# Altium PCB TDR2.PcbDoc
Units mm, origin at the board's own origin, x right, y up, seen from the top; angles counter-clockwise.
Board outline 36 x 36 mm, 2 copper layers (Top Layer, Bottom Layer), stack 1.67 mm thick; 27 components, 24 nets, 129 pads, 20 vias.
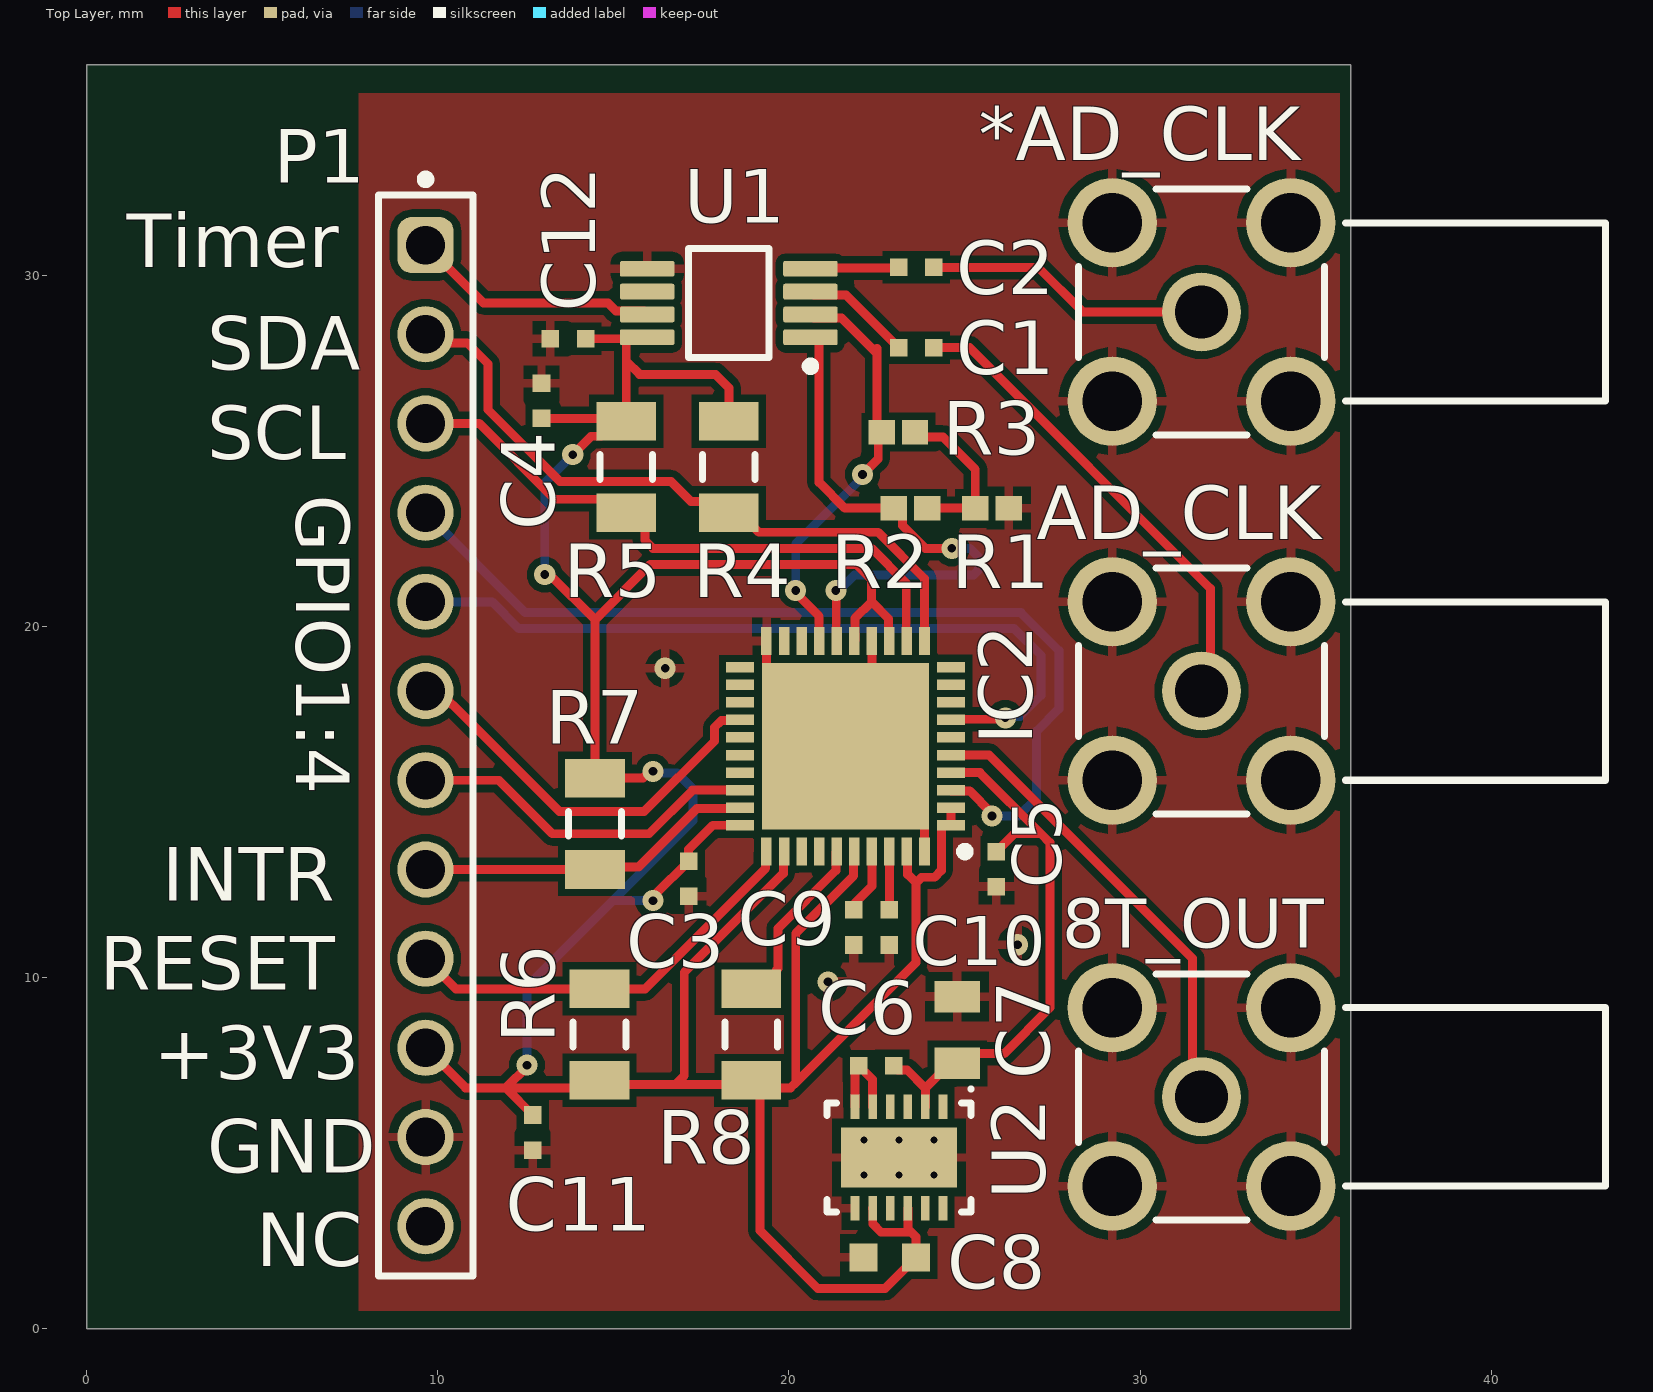
[diagram p0: Top Layer view]
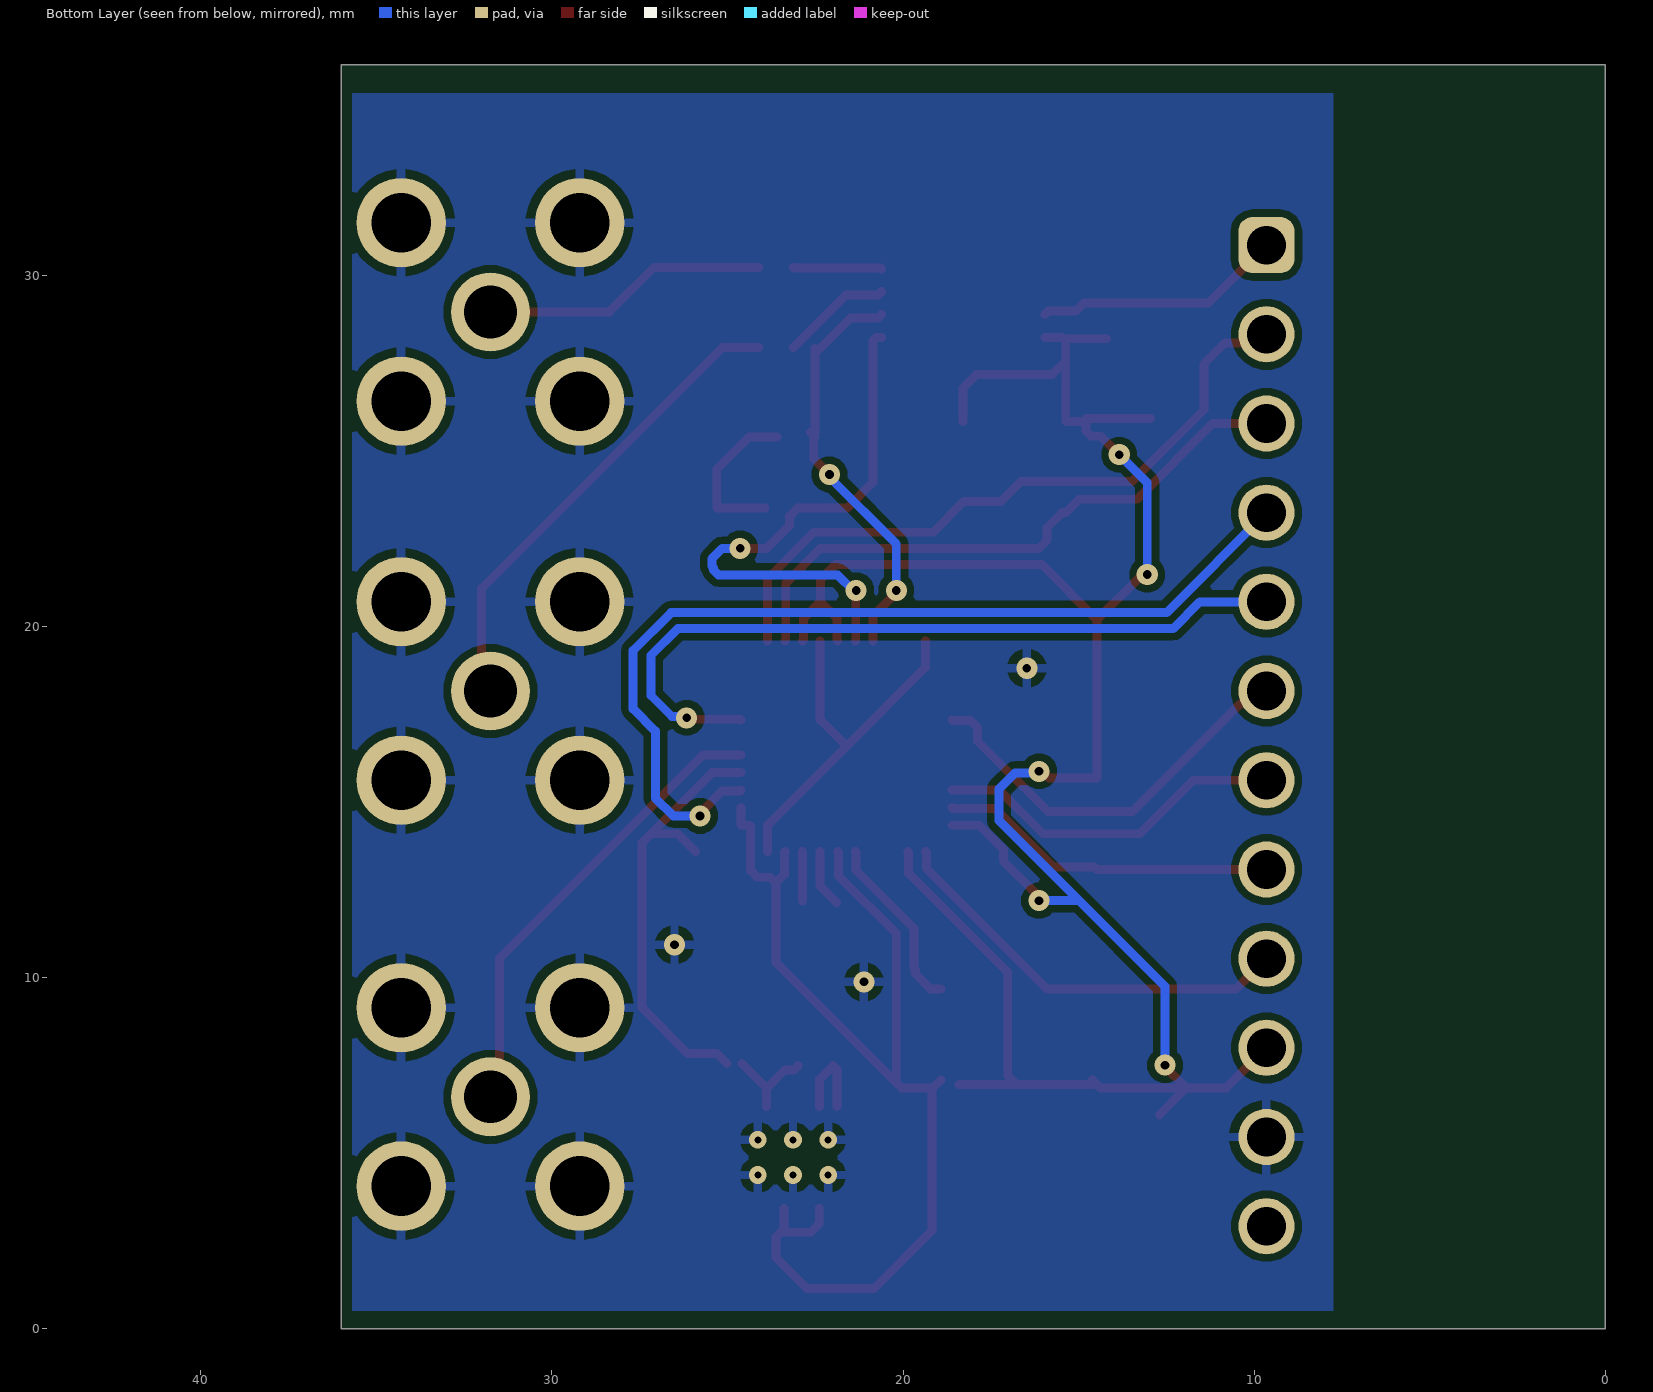
[diagram p1: Bottom Layer view, seen from below]

## Layer stack, top to bottom
Top Solder: solder mask 0.025, Solder Resist, Dk 3.5
Top Layer: signal copper 0.035
Dielectric 1: dielectric 1.6, FR-4, Dk 4.8
Bottom Layer: signal copper 0.035
Bottom Solder: solder mask 0.025, Solder Resist, Dk 3.5

## Board outline
0,0 0,36 36,36 36,0

## Design rules (kind name [scope] priority, off if disabled: settings)
Clearance [All] p1: gap=0.203 ignorepadtopadclearanceinfootprint=FALSE except(0.152: SMDPad-SMDPad)
PolygonConnect [All] p1: connectstyle=Relief reliefconductorwidth=0.254 reliefentries=4 polygonreliefangle="90 Angle" airgapwidth=0.254
RoutingVias [All] p1: holewidth=0.25 width=0.6 viastyle="Through Hole" minholewidth=0.25 minwidth=0.6 maxholewidth=0.25 maxwidth=0.6
SolderMaskExpansion [All] p1: expansion=0.102 istentingtop=FALSE
SupplyNets "Schematic Supply Nets_2" [InNet('GND')] p1: voltage=0.000
SupplyNets "Schematic Supply Nets_1" [InNet('+1V8')] p2: voltage=0.000
SupplyNets "Schematic Supply Nets" [InNet('+3V3')] p3: voltage=0.000
Width [All] p1: maxlimit=0.254 minlimit=0.254 preferedwidth=0.254
30 further rules are at their usual default settings.

## Components (designator, comment, footprint, x,y, rotation, side; value= is the part's Value field where it differs from the comment)
8T_OUT "60311002111526" 60311002111526 -1238.25,1276.604 r90 top
*AD_CLK "60311002111526" 60311002111526 -1238.25,1298.956 r90 top
AD_CLK "60311002111526" 60311002111526 -1238.25,1288.161 r90 top
C1 "0.1uF" WCAP-CSGP_0402_L1W0.5H0.5 23.622,27.94 r0 top
C2 "0.1uF" WCAP-CSGP_0402_L1W0.5H0.5 23.622,30.226 r0 top
C3 "0.1uF" WCAP-CSGP_0402_L1W0.5H0.5 17.145,12.819 r90 top
C4 "0.1uF" WCAP-CSGP_0402_L1W0.5H0.5 12.954,26.424 r270 top
C5 "0.1uF" WCAP-CSGP_0402_L1W0.5H0.5 25.908,13.089 r90 top
C6 "10nF" WCAP-CSGP_0402_L1W0.5H0.5 22.487,7.493 r0 top
C7 "10uF" WCAP-CSGP_0805_L2W1.25H1.25 24.792,8.509 r270 top
C8 "1uF" WCAP-CSGP_0603_L1.6W0.8H0.8_Reflow 22.872,2.032 r0 top
C9 "0.1uF" WCAP-CSGP_0402_L1W0.5H0.5 21.844,11.43 r90 top
C10 "0.1uF" WCAP-CSGP_0402_L1W0.5H0.5 22.86,11.43 r90 top
C11 "0.1uF" WCAP-CSGP_0402_L1W0.5H0.5 12.7,5.588 r90 top
C12 "0.1uF" WCAP-CSGP_0402_L1W0.5H0.5 13.708,28.194 r0 top
IC2 "8T49N241-999NLGI" QFN50P600X600X100-41N 21.61,16.589 r180 top
P1 "61301211121" 61301211121 9.652,16.891 r270 top
R1 "50" RESC1005X40X25ML10T10 25.781,23.368 r0 top
R2 "50" RESC1005X40X25ML10T10 23.462,23.368 r0 top
R3 "50" RESC1005X40X25ML10T10 23.114,25.527 r0 top
R4 "10K" RESC3216X70X50LL20T25 18.288,24.541 r90 top
R5 "10K" RESC3216X70X50LL20T25 15.367,24.541 r90 top
R6 "10K" RESC3216X70X50LL20T25 14.605,8.382 r90 top
R7 "10K" RESC3216X70X50LL20T25 14.478,14.381 r270 top
R8 "10K" RESC3216X70X50LL20T25 18.923,8.382 r270 top
U1 "SN65EPT22DGKR" DGK0008A_M 18.288,29.21 r180 top
U2 "LT1763CDE-1.8" LT-DE-UE-12_V 23.134,4.879 r270 top

## Footprints (in the part's own frame and the unit in brackets; to place one, negate y for a bottom-side part, rotate by r counter-clockwise, add the part's x,y. Pads: shape width x height; smd on the part's side, far side on the other; paste and mask are expansions set on the pad)
61301211121 [mm] "Pin Header, pitch 2.54 mm, THT, Vertical, single row, 12p"
  rrect50% 1.6x1.6 hole 1.1: 1(-13.97,0)
  round 1.6 hole 1.1: 2(-11.43,0) 3(-8.89,0) 4(-6.35,0) 5(-3.81,0) 6(-1.27,0) 7(1.27,0) 8(3.81,0) 9(6.35,0) 10(8.89,0) 11(11.43,0) 12(13.97,0)
  silkscreen extent -15.96,-1.35 15.39,1.35, body extent -15.24,-1.27 15.24,1.27, height 8.57
60311002111526 [mm] "SMA PCB THT Jack"
  round 2.25 hole 1.5: 1(-1270,-1270)
  round 2.55 hole 1.7: 2(-1272.54,-1267.46) 3(-1267.46,-1267.46) 4(-1267.46,-1272.54) 5(-1272.54,-1272.54)
  silkscreen extent -1273.5,-1281.5 -1266.5,-1266.5, body extent -1273.5,-1281.5 -1266.5,-1266.5, height 9.86
DGK0008A_M [mm] "TSOP, 8-Leads, Body 3.1x3.1mm, Pitch 0.65mm, IPC Low Density"
  rrect22% 1.55x0.45 smd: 1(-2.325,0.975) 2(-2.325,0.325) 3(-2.325,-0.325) 4(-2.325,-0.975) 5(2.325,-0.975) 6(2.325,-0.325) 7(2.325,0.325) 8(2.325,0.975)
  silkscreen extent -2.45,-1.55 1.15,1.92, body extent -2.45,-1.5 2.45,1.5, height 0.94
LT-DE-UE-12_V [mm] "SON, 12-Leads, Body 4x3mm, Pitch 0.5mm, Thermal Pad 3.3x1.7mm"
  rect 0.7x0.25 smd: 1(-1.45,1.25) 2(-1.45,0.75) 3(-1.45,0.25) 4(-1.45,-0.25) 5(-1.45,-0.75) 6(-1.45,-1.25) 7(1.45,-1.25) 8(1.45,-0.75) 9(1.45,-0.25) 10(1.45,0.25) 11(1.45,0.75) 12(1.45,1.25)
  rect 1.7x3.3 smd: 13(0,0)
  silkscreen extent -2,-2.05 1.55,2.1, body extent -1.5,-2 1.5,2, height 0.8
QFN50P600X600X100-41N [mm]
  rect 0.8x0.3 smd: 1(-3,2.25) 2(-3,1.75) 3(-3,1.25) 4(-3,0.75) 5(-3,0.25) 6(-3,-0.25) 7(-3,-0.75) 8(-3,-1.25) 9(-3,-1.75) 10(-3,-2.25) 21(3,-2.25) 22(3,-1.75) 23(3,-1.25) 24(3,-0.75) 25(3,-0.25) 26(3,0.25) 27(3,0.75) 28(3,1.25) 29(3,1.75) 30(3,2.25)
  rect 0.3x0.8 smd: 11(-2.25,-3) 12(-1.75,-3) 13(-1.25,-3) 14(-0.75,-3) 15(-0.25,-3) 16(0.25,-3) 17(0.75,-3) 18(1.25,-3) 19(1.75,-3) 20(2.25,-3) 31(2.25,3) 32(1.75,3) 33(1.25,3) 34(0.75,3) 35(0.25,3) 36(-0.25,3) 37(-0.75,3) 38(-1.25,3) 39(-1.75,3) 40(-2.25,3)
  rect 4.75x4.75 smd: 41(0,0)
  silkscreen extent -3.53,2.88 -3.28,3.12, body extent -3.05,-3.05 3.05,3.05, height 1
RESC1005X40X25ML10T10 [mm] "Chip Resistor, 2-Leads, Body 1.00x0.50mm, IPC Low Density"
  rect 0.75x0.7 smd: 1(-0.475,0) 2(0.475,0)
  body extent -0.55,-0.3 0.55,0.3, height 0.4
RESC3216X70X50LL20T25 [mm] "Chip Resistor, 2-Leads, Body 3.20x1.60mm, IPC High Density"
  rect 1.1x1.7 smd: 1(-1.3,0) 2(1.3,0)
  silkscreen extent -0.35,-0.75 0.35,0.75, body extent -1.7,-0.9 1.7,0.9, height 0.7
WCAP-CSGP_0402_L1W0.5H0.5 [mm] "Ceramic Capacitors, body 1x0.5mm"
  rect 0.5x0.5 smd: 1(-0.5,0) 2(0.5,0)
  body extent -0.5,-0.25 0.5,0.25, height 0.5
WCAP-CSGP_0603_L1.6W0.8H0.8_Reflow [mm] "Ceramic Capacitors, body 1.6x0.8mm"
  rect 0.8x0.8 smd: 1(-0.75,0) 2(0.75,0)
  body extent -0.8,-0.4 0.8,0.4, height 0.8
WCAP-CSGP_0805_L2W1.25H1.25 [mm] "Ceramic Capacitors, body 2x1.25mm"
  rect 0.9x1.3 smd: 1(-0.95,0) 2(0.95,0)
  body extent -1,-0.63 1,0.63, height 1.25

## Part data
8T_OUT *AD_CLK AD_CLK: library part CMP-03913-134708249-2, "60311002111526 WR-SMA_SMA PCB THT Jack_Right Angle", Insulation Resistance=5GΩ, Max Operating Temperature=165°C, Min Operating Temperature=-65°C, Connector Type=SMA, Impedance=50Ω, Insertion Loss (dB)=0.14dB, Insulation Material=PTFE, NexarPartId=134708249
C1 C2 C3 C4 C5 C9 C10 C11 C12: library part CMP-207839-000049-2, "CAP CER 0.1UF 10V X7R 0402", Capacitance=100nF, Case Code (Imperial)=0402, Case Code (Metric)=1005, Dielectric=X7R, Insulation Resistance=5GΩ, Max Operating Temperature=125°C, Min Operating Temperature=-55°C, Tolerance=10%, Voltage Rating=10V, Case/Package=0402, Height=500µm, Length=1mm, Material=Ceramic, Mount="Surface Mount", NexarPartId=53703156, Packaging="Tape & Reel (TR)", REACH SVHC=Unknown, RoHS=Compliant, Thickness=558.8µm, Voltage Rating (DC)=10V, Width=500µm
C6: library part CMP-207839-000042-2, "CAP CER 10000PF 10V X7R 0402", Case Code (Imperial)=0402, Case Code (Metric)=1005, Dielectric=X7R, Insulation Resistance=10GΩ, Max Operating Temperature=125°C, Min Operating Temperature=-55°C, Tolerance=10%, Voltage Rating=10V, Capacitance=10nF, Case/Package=0402, Height=500µm, Length=1mm, Material=Ceramic, Mount="Surface Mount", NexarPartId=53703150, Packaging="Tape & Reel (TR)", RoHS=Compliant, Thickness=558.8µm, Voltage Rating (DC)=10V, Width=500µm
C7: library part CMP-03913-65419800-1, "885012207026 Multilayer Ceramic Capacitor, Wcap-Csgp Series, 10 F, 10%, X7r, 10 V, 0805 [2012 Metric]", Capacitance=10µF, Case Code (Imperial)=0805, Case Code (Metric)=2012, Dielectric=X7R, Insulation Resistance=10MΩ, Max Operating Temperature=125°C, Min Operating Temperature=-55°C, Tolerance=10%, Voltage Rating=10V, Case/Package=0805, Height=1.25mm, Length=2mm, Mount="Surface Mount", NexarPartId=65419800, Packaging=Digi-Reel®, REACH SVHC=Unknown, RoHS=Compliant, Thickness=1.4478mm, Voltage Rating (DC)=10V, Width=1.25mm
C8: library part CMP-207839-000022-2, "CAP CER 1UF 10V X7R 0603", Capacitance=1µF, Case Code (Imperial)=0603, Case Code (Metric)=1608, Dielectric=X7R, Insulation Resistance=100MΩ, Max Operating Temperature=125°C, Min Operating Temperature=-55°C, Tolerance=10%, Voltage Rating=10V, Case/Package=0603, Height=800µm, Length=1.6mm, Material=Ceramic, Mount="Surface Mount", NexarPartId=53914735, Packaging="Tape & Reel (TR)", RoHS=Compliant, Thickness=939.8µm, Voltage Rating (DC)=10V, Width=800µm
IC2: "Integrated Circuit", Manufacturer_Name="Renesas Electronics", Mouser Part Number=972-8T49N241-999NLGI, Datasheet Link=https://www.idt.com/document/dst/8t49n241-datasheet, Height=1mm, Manufacturer_Part_Number=8T49N241-999NLGI, Mouser Price/Stock=https://www.mouser.co.uk/ProductDetail/Renesas-Electronics/8T49N241-999NLGI?qs=ZwKJWZfDtNjnVZ7GQAcPpQ%3D%3D
P1: library part CMP-1502-01086-3, Color=Black, Contact Resistance=20mΩ, Current Rating=3A, Operating Supply Voltage=250V, Connector Type="Male Pin", Contact Material=Copper, Contact Mating Length=5.9944mm, Contact Plating=Gold, Gender=Male, Lead Pitch=2.54mm, Mount="Through Hole", NexarPartId=32855538, Number of Contacts=12, Number of Pins=12, Number of Positions=12, Number of Rows=1, Orientation=Vertical, Packaging=Bulk, Pitch=2.54mm, REACH SVHC=Unknown, RoHS=Compliant, Termination=Solder
R1 R2 R3: library part CMP-2002-06296-1, Manufacturer=Multicomp, Part Number=MC00625W0402160R4
R4 R5 R6 R7 R8: library part CMP-2003-04407-1, Manufacturer=Panasonic, Part Number=ERA8AEB103V
U1: library part CMP-0327-00215-3, "4000 Mbps 3.3 V Dual LVTTL / LVCMOS to Differential LVPECL Buffer, 2 Tx and 2 Rx, -40 to +85 degC, 8-pin VSSOP (DGK), Green (RoHS & no Sb/Br)", Manufacturer="Texas Instruments", ComponentLink1Description="Manufacturer URL", ComponentLink1URL=http://www.ti.com/, ComponentLink2Description=Datasheet, ComponentLink2URL=http://www.ti.com/general/docs/lit/getliterature.tsp?genericPartNumber=SN65EPT22&fileType=pdf, ComponentLink3Description="URL Link1", ComponentLink3URL=SamplesURL:http://www.ti.com/product/sn65ept22#samples, DatasheetVersion=SLLS926A, Eco-Plan="Green (RoHS & no Sb/Br)", ICC(Max)(mA)=50, Input Signal="LVTTL, CMOS", Mounting Technology="Surface Mount", No. of Rx=2, No. of Tx=2, Output Signal=LVPECL, PackageDescription="8-Pin Thin Small Outline Package 3 x 3 mm Body ,0.65 mm Pitch", PackageReference=DGK0008A, PackageVersion="revE, May-2006", PartNumber=SN65EPT22DGKR, Signaling Rate(Mbps)=4000, SubFamily="PECL PHY", xECL=TRUE
U2: library part CMP-0476-00416-1, "500 mA, Low Noise, LDO Micropower Regulator, 1.8 to 20 V Vin, 1.8 V Vout, 12-pin SON (DE-UE-12), -40 to 125 degC", Dropout Voltage(V)=0.3, Manufacturer="Linear Technology", Output Voltage="1.8 V", Shutdown Current(uA)=1, Code_JEDEC=MO-229, ComponentLink1Description="Manufacturer URL", ComponentLink1URL=http://www.linear.com/, ComponentLink2Description=Datasheet, ComponentLink2URL=http://cds.linear.com/docs/en/datasheet/1763fg.pdf, ComponentLink3Description="Package Specification", ComponentLink3URL=http://cds.linear.com/docs/en/packaging/DFN_12_05-08-1695.pdf, DatasheetVersion="Rev. G", Discrete Pass Element=no, Iout(mA)=500, Isupply(mA)=0.03, Mounting Technology="Surface Mount", Noise(uV)=20, Number of Outputs=1, PackageDescription="12-Pin Plastic DFN, Body 4 x 3 mm, Pitch 0.5 mm", PackageReference=DE-UE-12, PackageVersion="Rev. D, 06/2010", PartNumber=LT1763CDE-1.8, PSRR(dB)=65, RoHS=FALSE, Vin Max(V)=20, Vin Min(V)=1.8

## Via types
v1: diameter 0.6, hole 0.25, Top Layer to Bottom Layer, 14 vias
v2: diameter 0.5, hole 0.2, Top Layer to Bottom Layer, 6 vias

## Nets (pads, with @x,y where several pads share a name; then routed paths per layer and width w, separated by ;. In a path a pad name is that pad's centre, name@x,y a point inside that pad or via, vN(x,y) a via of type N, cw(c..) or ccw(c..) an arc to the next point about the centre after c; other vN are vias at no path point)
8T_*CLK: IC2.17 R3.1 U1.2 | length 12
  Top Layer w0.254: v1(20.193,21.026) 20.193,20.955 20.86,20.288 IC2.17 ; U1.2 20.708,28.79 21.496,28.79 22.503,27.783 ; v1(22.098,24.329) 22.543,24.775 22.543,25.375 22.503,25.415 22.614,25.527 R3.1 ; R3.1@22.503,25.527 22.503,27.91
  Bottom Layer w0.254: v1(20.193,21.026) 20.193,22.352 22.098,24.257 v1(22.098,24.329)
8T_CLK: IC2.16 R2.1 U1.1 | length 16
  Top Layer w0.254: U1.1 20.759,28.235 20.857,28.137 20.857,24.101 21.59,23.368 R2.1@22.962,23.368 ; v1(21.336,21.026) 21.348,21.014 21.348,19.601 IC2.16 ; R2.1 23.009,23.368 23.232,23.145 23.232,22.881 23.888,22.225 v1(24.638,22.225)
  Bottom Layer w0.254: v1(21.336,21.026) 21.426,21.026 21.862,21.463 25.251,21.463 25.4,21.612 25.4,21.673 25.444,21.717 25.444,21.927 25.146,22.225 v1(24.638,22.225)
+1V8: C5.2 C6.2 C7.2 IC2.4 U2.2 | length 15.6
  Top Layer w0.254: C6.2 23.11,7.37 23.369,7.37 23.886,6.853 ; U2.2 23.886,6.331 23.886,6.853 ; C7.2@24.592,7.559 23.886,6.853 ; IC2.4 25.436,15.839 27.178,14.097 ; C7.2@25.019,7.559 25.297,7.837 26.125,7.837 27.432,9.144 27.432,13.843 27.178,14.097 ; C5.2 26.416,14.097 27.178,14.097
+3V3: C3.2 C4.2 C8.2 C11.2 C12.2 IC2.1 IC2.2 IC2.13 IC2.15 IC2.30 IC2.32 IC2.36 IC2.39 P1.10 R4.2 R5.2 R6.1 R7.1 R8.2 U1.8 U2.8 U2.10 | length 103.7
  Top Layer w0.254: P1.10 10.795,6.858 11.93,6.858 ; v1@12.573,7.493 11.938,6.858 ; C11.2 11.93,6.858 ; C4.2 R5.2@14.792,25.924 ; v1@13.081,21.463 13.208,21.463 14.478,20.193 ; v1(13.843,24.892) 14.369,25.418 14.644,25.418 14.792,25.566 14.792,25.841 R5.2 15.367,27.559 ; C12.2 U1.8@15.367,28.194 ; R6.1@14.605,6.955 16.764,6.955 ; R6.1 14.381,6.858 11.938,6.858 ; U1.8 15.465,28.235 15.367,28.137 15.367,27.559 ; v1(16.128,15.876) 16.034,15.876 15.839,15.681 R7.1 14.478,20.193 ; v1(16.129,12.192) 16.195,12.258 16.195,12.369 C3.2 17.145,13.65 17.834,14.339 IC2.30 ; R4.2 18.288,26.797 17.907,27.178 15.748,27.178 15.367,27.559 ; R8.2@18.415,6.955 16.764,6.955 ; R8.2 R8.2@19.147,6.858 ; IC2.32 19.84,13.569 19.84,12.971 17.018,10.148 17.018,7.209 16.764,6.955 ; IC2.36 21.84,13.569 21.84,12.906 20.193,11.258 20.193,7.007 ; IC2.15 21.88,19.609 21.88,20.229 22.352,20.701 ; U2.8 22.386,3.427 22.386,2.985 22.622,2.749 23.485,2.749 ; IC2.13 22.84,19.609 22.84,20.213 22.352,20.701 ; IC2.39 23.38,13.569 23.38,12.942 23.622,12.7 ; U2.10 23.386,3.427 23.386,2.848 23.485,2.749 ; IC2.2 IC2.1 24.363,14.339 24.34,14.316 24.34,13.052 24.147,12.859 23.781,12.859 23.622,12.7 ; 11.93,6.858 11.938,6.858 ; 14.478,20.193 16.053,21.768 21.92,21.768 22.352,21.336 22.352,20.701 ; R8.2@19.147,6.858 20.044,6.858 20.193,7.007 ; R8.2@19.147,6.858 19.177,6.828 19.177,2.794 20.828,1.143 22.733,1.143 C8.2 23.622,2.612 23.485,2.749 ; 20.193,7.007 23.622,10.436 23.622,12.7
  Bottom Layer w0.254: v1(12.538,7.507) 12.538,9.744 14.986,12.192 ; v1(13.046,21.477) 13.046,24.095 v1(13.843,24.892) ; v1(16.128,15.876) 16.174,15.83 16.809,15.83 17.272,15.367 17.272,14.478 14.986,12.192 ; v1(16.129,12.192) 14.986,12.192
AD_*CLK: *AD_CLK.1 C2.2 | length 8.2
  Top Layer w0.254: C2.2 27.092,30.226 28.363,28.956 *AD_CLK.1
AD_CLK: AD_CLK.1 C1.2 | length 13.6
  Top Layer w0.254: C1.2 25.146,27.94 32.004,21.082 AD_CLK.1@32.004,18.161
GND: 8T_OUT.2 8T_OUT.3 8T_OUT.4 8T_OUT.5 *AD_CLK.2 *AD_CLK.3 *AD_CLK.4 *AD_CLK.5 AD_CLK.2 AD_CLK.3 AD_CLK.4 AD_CLK.5 C3.1 C4.1 C5.1 C7.1 C8.1 C9.1 C10.1 C11.1 C12.1 IC2.14 IC2.20 IC2.40 IC2.41 P1.11 R1.2 U1.5 U2.7 U2.13 | length 11.2
  Top Layer w0.254: IC2.20 19.362,19.587 19.362,18.837 IC2.41 ; IC2.14 22.36,17.339 IC2.41 ; IC2.40 23.858,13.591 23.858,14.341 IC2.41
  other v1: 21.114,9.881 26.508,10.936 16.475,18.81
  other v2: 22.134,4.379 23.134,4.379 24.134,4.379 22.134,5.379 23.134,5.379 24.134,5.379
GPIO_1: IC2.3 P1.4 | length 27.1
  Top Layer w0.254: IC2.3 24.63,15.319 25.147,15.319 25.78,14.686 v1(25.78,14.604)
  Bottom Layer w0.254: P1.4 12.497,20.396 26.605,20.396 27.686,19.316 27.686,17.653 27.051,17.018 27.051,15.113 26.542,14.604 v1(25.78,14.604)
GPIO_2: IC2.7 P1.5 | length 22.2
  Top Layer w0.254: IC2.7 24.63,17.359 26.122,17.359 v1(26.162,17.399)
  Bottom Layer w0.254: P1.5 11.545,20.701 12.307,19.939 26.416,19.939 27.178,19.177 27.178,18.034 26.58,17.436 26.199,17.436 v1(26.162,17.399)
GPIO_3: IC2.24 P1.6 | length 11.7
  Top Layer w0.254: P1.6 10.016,18.161 10.407,17.77 10.424,17.77 13.462,14.732 15.875,14.732 17.88,16.737 17.88,17.126 18.073,17.319 18.59,17.319 IC2.24
GPIO_4: IC2.28 P1.7 | length 10.1
  Top Layer w0.254: P1.7 11.739,15.621 13.263,14.097 16.015,14.097 17.257,15.339 IC2.28
INTR: IC2.29 P1.8 R7.2 | length 9.7
  Top Layer w0.254: P1.8 R7.2 14.544,13.147 15.711,13.147 17.383,14.819 18.59,14.819 IC2.29
NetC1_1: C1.1 U1.3 | length 3.2
  Top Layer w0.254: U1.3 20.708,29.44 21.622,29.44 C1.1
NetC2_1: C2.1 U1.4 | length 2.5
  Top Layer w0.254: U1.4 20.634,30.206 23.101,30.206 C2.1
NetC6_1: C6.1 U2.5 U2.6 | length 2.5
  Top Layer w0.254: U2.6 21.884,7.39 C6.1 22.384,7.096 U2.5
NetC9_2: C9.2 IC2.37 | length 1.6
  Top Layer w0.254: C9.2@21.893,12.135 22.36,12.601 IC2.37
NetC10_2: C10.2 IC2.38 | length 1.4
  Top Layer w0.254: 22.86,12.184 IC2.38
NetIC2_35: IC2.35 R8.1 | length 5.1
  Top Layer w0.254: R8.1 19.223,9.682 19.646,10.105 19.646,10.215 19.685,10.254 19.685,11.397 21.34,13.052 21.34,13.569 IC2.35
NetR1_1: R1.1 R2.2 R3.2 | length 4.6
  Top Layer w0.254: R3.2@23.589,25.4 24.384,25.4 25.306,24.478 R1.1 R2.2
RESET: IC2.31 P1.9 R6.2 | length 11.9
  Top Layer w0.254: P1.9 10.511,9.682 15.905,9.682 19.337,13.114 19.337,13.566 IC2.31
SCL: IC2.12 P1.3 R5.1 | length 17.4
  Top Layer w0.254: P1.3 11.176,25.781 13.335,23.622 14.986,23.622 R5.1 15.472,23.241 15.895,22.818 15.895,22.459 16.129,22.225 22.352,22.225 23.34,21.237 23.34,19.609 IC2.12
SDA: IC2.11 P1.2 R4.1 | length 19.6
  Top Layer w0.254: P1.2 9.9,28.073 10.833,28.073 11.43,27.476 11.43,26.174 13.474,24.13 16.637,24.13 17.206,23.561 18.268,23.561 19.147,22.682 22.541,22.682 23.86,21.364 IC2.11
SMA_OUT_1: 8T_OUT.1 IC2.5 | length 13.7
  Top Layer w0.254: IC2.5 25.698,16.339 31.496,10.541 31.496,6.477 8T_OUT.1@31.75,6.223
TIMER_STM32: P1.1 U1.7 | length 7.1
  Top Layer w0.254: P1.1 11.303,29.21 14.85,29.21 15.08,28.98 15.868,28.98 U1.7
pads on no net: IC2.6 IC2.8 IC2.9 IC2.10 IC2.18 IC2.19 IC2.21 IC2.22 IC2.23 IC2.25 IC2.26 IC2.27 IC2.33 IC2.34 P1.12 U1.6 U2.1 U2.3 U2.4 U2.9 U2.11 U2.12

## Polygon pours and split planes (outlines as drawn)
GND on Top Layer "GND_L01_P001" (solid, pour order 1): 7.747,0.508 35.687,0.508 35.687,35.179 7.747,35.179
GND on Bottom Layer "GND_L02_P000" (solid, pour order 0): 7.747,35.179 7.747,0.508 35.687,0.508 35.687,35.179

## Silkscreen, mask and mechanical layers (free items; w line width, h text height)
Top Overlay:
  text "Timer" at 1.143,30.226 h1.52
  text "SDA" at 3.429,27.305 h1.52
  text "SCL" at 3.429,24.765 h1.52
  text "GPIO1:4" at 5.969,23.749 h1.52 r270
  text "INTR" at 2.159,12.192 h1.52
  text "RESET" at 0.381,9.652 h1.52
  text "+3V3" at 1.905,7.112 h1.52
  text "GND" at 3.429,4.445 h1.52
  text "NC" at 4.826,1.778 h1.52
Mechanical 1:
  the board outline again, w0.254